# Altium PCB BMS can bang thu dong 4N04R nen nhom.PcbDoc
Units mm, origin at the board's own origin, x right, y up, seen from the top; angles counter-clockwise.
Board outline 114.94 x 60.96 mm, 2 copper layers (Top Layer, Bottom Layer); 103 components, 69 nets, 336 pads, 96 vias.
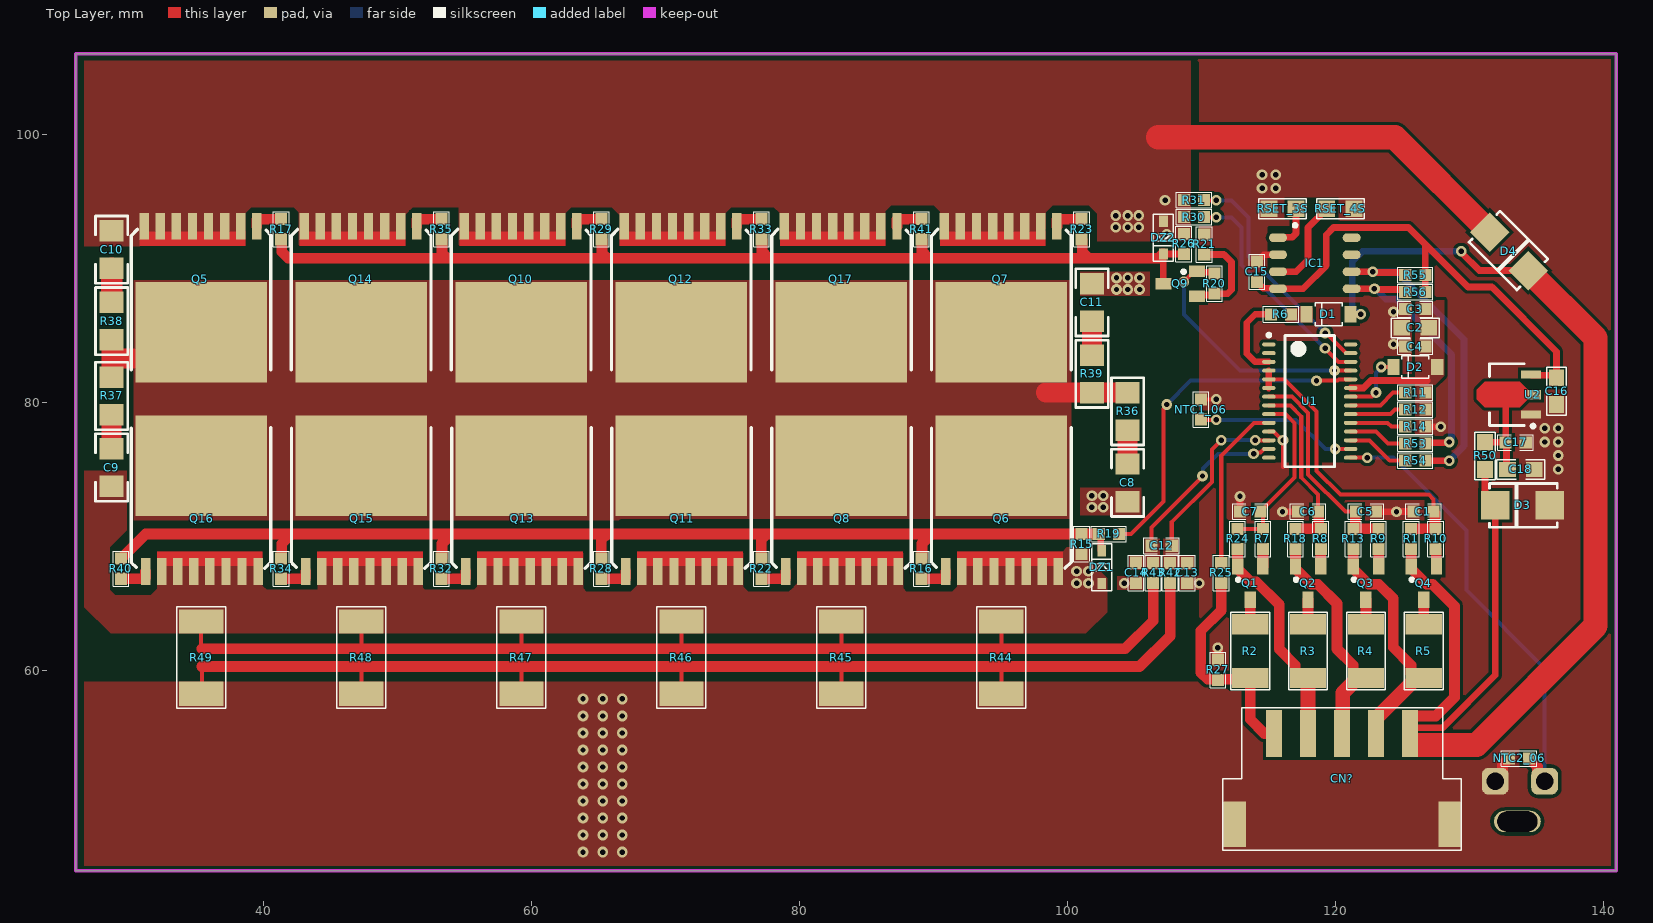
[diagram p0: Top Layer view]
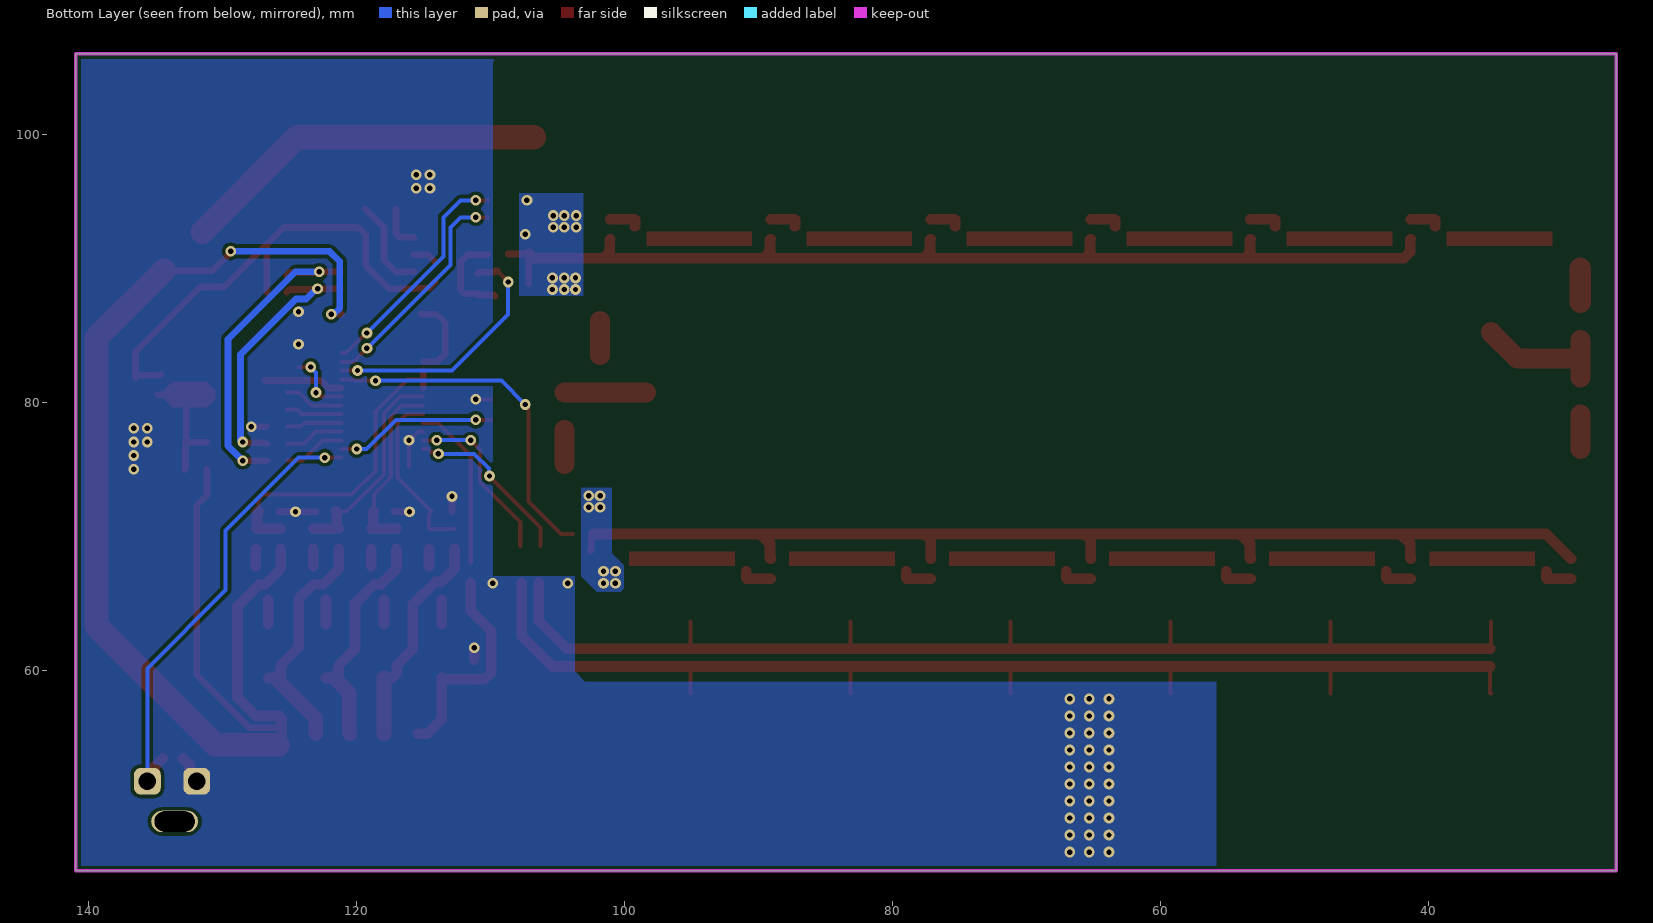
[diagram p1: Bottom Layer view, seen from below]
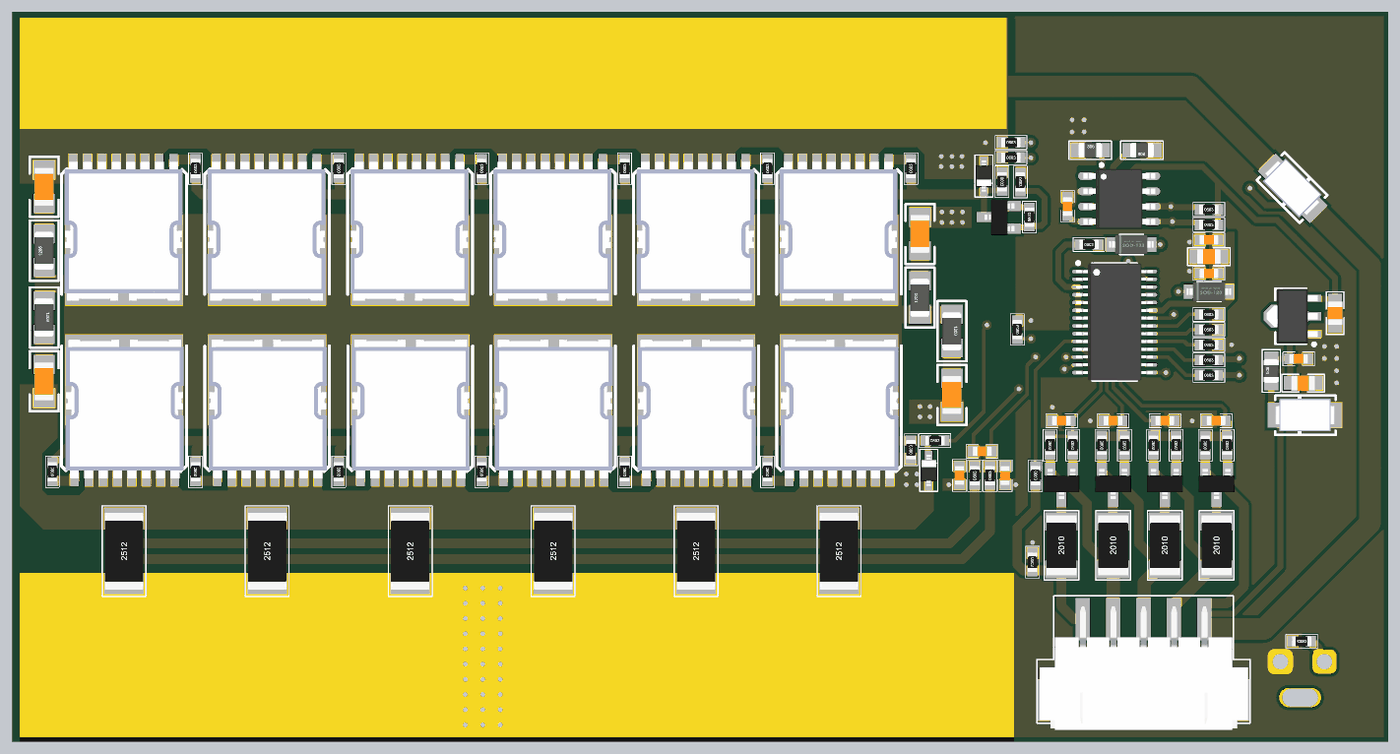
[diagram p2: 3D render of the assembled board from above, using the file's embedded part models]

## Layer stack, top to bottom
Top Solder: solder mask 0.0102, Solder Resist, Dk 3.5
Top Layer: signal copper 0.0356
Dielectric 1: dielectric 0.32, FR-4, Dk 4.8
Bottom Layer: signal copper 0.0356
Bottom Solder: solder mask 0.0102, Solder Resist, Dk 3.5

## Board outline
26.035,45.085 26.035,106.045 140.97,106.045 140.97,45.085

## Design rules (kind name [scope] priority, off if disabled: settings)
Clearance [All] p1: gap=0.15 ignorepadtopadclearanceinfootprint=FALSE except(0.25: Arc-Fill Arc-Poly Arc-Region Track-Fill Track-Poly Track-Region SMDPad-Fill SMDPad-Poly SMDPad-Region THPad-Fill THPad-Poly THPad-Region Via-Fill Via-Poly Via-Region Fill-Fill Fill-Poly Fill-Region Poly-Poly Poly-Region Region-Region)
MinimumSolderMaskSliver [All] p1: minsoldermaskwidth=0
PlaneClearance [All] p1: clearance=0.3
PlaneConnect [All] p1: planeconnectstyle=Direct reliefexpansion=0.508 reliefentries=4 reliefconductorwidth=0.254 reliefairgap=0.254
PolygonConnect [All] p1: connectstyle=Direct reliefconductorwidth=0.254 reliefentries=4 polygonreliefangle="90 Angle" airgapwidth=0.254
RoutingCorners [All] p1: cornerstyle=45-Degree minsetback=0.5 maxsetback=0.5
RoutingVias [All] p1: holewidth=0.4 width=0.8 viastyle="Through Hole" minholewidth=0.3 minwidth=0.45 maxholewidth=0.6 maxwidth=1
SilkToSilkClearance [All] p1: silktosilkclearance=0
SilkToSolderMaskClearance [IsPad] p1: minsilkscreentomaskgap=0 clearancetoexposedcopper=TRUE
SolderMaskExpansion [All] p1: expansion=0.05 istentingtop=FALSE
SupplyNets "Schematic Supply Nets_1" [InNet('B-')] p1: voltage=0.000
Width [All] p1: maxlimit=3 minlimit=0.15 preferedwidth=0.3
24 further rules are at their usual default settings.

## Components (designator, comment, footprint, x,y, rotation, side; value= is the part's Value field where it differs from the comment)
C1 "104_06_50V" "CAP 0603" 126.594,71.894 r0 top value=102/50V
C2 "475_08_16V" "CAP 0805" 125.984,85.598 r0 top
C3 "104_06_16V" "CAP 0603" 125.984,86.995 r180 top
C4 "104_06_16V" "CAP 0603" 125.984,84.201 r0 top
C5 "104_06_50V" "CAP 0603" 122.306,71.894 r180 top value=102/50V
C6 "104_06_50V" "CAP 0603" 117.988,71.894 r0 top value=102/50V
C7 "104_06_50V" "CAP 0603" 113.67,71.894 r0 top value=102/50V
C8 "102_12_50V" "CAPC 1206 (3216)" 104.521,74.041 r90 top
C9 "102_12_50V" "CAPC 1206 (3216)" 28.702,75.181 r90 top
C10 "102_12_50V" "CAPC 1206 (3216)" 28.702,91.44 r270 top
C11 "102_12_50V" "CAPC 1206 (3216)" 101.854,87.503 r270 top
C12 "1uF_06_50V" "CAP 0603" 107.061,69.342 r0 top
C13 "1uF_06_50V" "CAP 0603" 108.966,67.31 r270 top
C14 "1uF_06_50V" "CAP 0603" 105.156,67.322 r90 top
C15 "104_06_16V" "CAP 0603" 114.173,89.789 r270 top
C16 "106_08_16V" "CAP 0805" 136.526,80.875 r90 top
C17 "104_06_50V" "CAP 0603" 133.478,77.059 r180 top
C18 "106_08_50V" "CAP 0805" 133.859,75.033 r180 top
CN? "header" "header 5p 2.54mm" 120.523,51.943 r180 top
D1 "1N4148 (T4)" "SOD-123(4148W-1206 part-part)" 119.507,86.614 r0 top
D2 "1N4148 (T4)" "SOD-123(4148W-1206 part-part)" 125.984,82.677 r0 top
D3 "SMAJ16A - PACKAGE DO214AC" DIODE_DO214AC_SMA(RS1,.M7) 133.986,72.366 r180 top
D4 "RS1M" DIODE_DO214AC_SMA(RS1,.M7) 132.969,91.313 r315 top
DZ1 "13V" SOD-323(4148WS-0805) 102.583,67.74 r90 top
DZ2 "13V" SOD-323(4148WS-0805) 107.188,92.329 r270 top
IC1 "CH32V003J4M6" CH32V003J4M6 118.491,90.424 r0 top
NTC1_06 "10KΩ_06" "RES 0603-1608 1/10W" 109.982,79.502 r90 top
NTC2_06 "10KΩ_06" "RES 0603-1608 1/10W" 133.731,53.467 r180 top
Q1 "2L (2N5401)" SOT23B 113.665,66.56 r180 top value=A1015
Q2 "2L (2N5401)" SOT23B 117.983,66.56 r180 top value=A1015
Q3 "2L (2N5401)" SOT23B 122.301,66.56 r180 top value=A1015
Q4 "2L (2N5401)" SOT23B 126.619,66.56 r180 top value=A1015
Q5 "HYG011N04" "FET khoi dong xe - duplicate" 35.331,89.231 r180 top
Q6 "HYG011N04" "FET khoi dong xe - duplicate" 95.144,71.374 r0 top
Q7 "HYG011N04" "FET khoi dong xe - duplicate" 95.042,89.231 r180 top
Q8 "HYG011N04" "FET khoi dong xe - duplicate" 83.206,71.374 r0 top
Q9 "2L (2N5401)" SOT23B 108.438,88.9 r90 top value=A1015
Q10 "HYG011N04" "FET khoi dong xe - duplicate" 59.216,89.231 r180 top
Q11 "HYG011N04" "FET khoi dong xe - duplicate" 71.268,71.374 r0 top
Q12 "HYG011N04" "FET khoi dong xe - duplicate" 71.158,89.231 r180 top
Q13 "HYG011N04" "FET khoi dong xe - duplicate" 59.33,71.374 r0 top
Q14 "HYG011N04" "FET khoi dong xe - duplicate" 47.274,89.231 r180 top
Q15 "HYG011N04" "FET khoi dong xe - duplicate" 47.38,71.374 r0 top
Q16 "HYG011N04" "FET khoi dong xe - duplicate" 35.433,71.374 r0 top
Q17 "HYG011N04" "FET khoi dong xe - duplicate" 83.104,89.231 r180 top
R1 "1KΩ_06" "RES 0603-1608 1/10W" 125.679,69.85 r270 top
R2 "51Ω_12" "RES 2010-5025 3/4W" 113.665,61.48 r90 top
R3 "51Ω_12" "RES 2010-5025 3/4W" 117.983,61.48 r90 top
R4 "51Ω_12" "RES 2010-5025 3/4W" 122.301,61.48 r90 top
R5 "51Ω_12" "RES 2010-5025 3/4W" 126.619,61.48 r90 top
R6 "10Ω_06" "RES 0603-1608 1/10W" 115.963,86.614 r0 top
R7 "510Ω_06" "RES 0603-1608 1/10W" 114.615,69.85 r90 top
R8 "510Ω_06" "RES 0603-1608 1/10W" 118.933,69.85 r90 top
R9 "510Ω_06" "RES 0603-1608 1/10W" 123.251,69.85 r90 top
R10 "510Ω_06" "RES 0603-1608 1/10W" 127.508,69.85 r90 top
R11 "10KΩ_06" "RES 0603-1608 1/10W" 125.984,80.772 r0 top
R12 "10KΩ_06" "RES 0603-1608 1/10W" 125.984,79.502 r0 top
R13 "1KΩ_06" "RES 0603-1608 1/10W" 121.361,69.85 r270 top
R14 "10MΩ_06" "RES 0603-1608 1/10W" 125.984,78.232 r0 top
R15 "10KΩ_06" "RES 0603-1608 1/10W" 101.092,69.469 r90 top
R16 "68Ω" "RES 0603-1608 1/10W" 89.124,67.627 r270 top
R17 "68Ω" "RES 0603-1608 1/10W" 41.353,92.964 r90 top
R18 "1KΩ_06" "RES 0603-1608 1/10W" 117.043,69.85 r270 top
R19 "1KΩ_06" "RES 0603-1608 1/10W" 103.112,70.231 r0 top
R20 "1MΩ_06" "RES 0603-1608 1/10W" 110.998,88.9 r90 top
R21 "100KΩ_06" "RES 0603-1608 1/10W" 110.236,91.833 r270 top
R22 "68Ω" "RES 0603-1608 1/10W" 77.186,67.627 r270 top
R23 "68Ω" "RES 0603-1608 1/10W" 101.092,92.964 r90 top
R24 "1KΩ_06" "RES 0603-1608 1/10W" 112.725,69.85 r270 top
R25 "1KΩ_06" "RES 0603-1608 1/10W" 111.506,67.31 r270 top
R26 "10KΩ_06" "RES 0603-1608 1/10W" 108.712,91.864 r270 top
R27 "1KΩ_06" "RES 0603-1608 1/10W" 111.252,60.083 r270 top
R28 "68Ω" "RES 0603-1608 1/10W" 65.248,67.627 r270 top
R29 "68Ω" "RES 0603-1608 1/10W" 65.248,92.964 r90 top
R30 "10KΩ_06" "RES 0603-1608 1/10W" 109.462,93.872 r0 top
R31 "10KΩ_06" "RES 0603-1608 1/10W" 109.462,95.142 r0 top
R32 "68Ω" "RES 0603-1608 1/10W" 53.31,67.627 r270 top
R33 "68Ω" "RES 0603-1608 1/10W" 77.186,92.964 r90 top
R34 "68Ω" "RES 0603-1608 1/10W" 41.353,67.627 r270 top
R35 "68Ω" "RES 0603-1608 1/10W" 53.31,92.964 r90 top
R36 "10Ω_12" "RES 1206- 3216 1/4W" 104.521,79.369 r270 top
R37 "10Ω_12" "RES 1206- 3216 1/4W" 28.702,80.518 r270 top
R38 "10Ω_12" "RES 1206- 3216 1/4W" 28.702,86.106 r90 top
R39 "10Ω_12" "RES 1206- 3216 1/4W" 101.854,82.169 r90 top
R40 "68Ω" "RES 0603-1608 1/10W" 29.396,67.627 r270 top
R41 "68Ω" "RES 0603-1608 1/10W" 89.124,92.964 r90 top
R42 "22Ω_06" "RES 0603-1608 1/10W" 107.696,67.31 r90 top
R43 "22Ω_06" "RES 0603-1608 1/10W" 106.426,67.31 r90 top
R44 "1.5mΩ" "RES 2512-6332 1W" 95.118,61 r0 top
R45 "1.5mΩ" "RES 2512-6332 1W" 83.18,61 r0 top
R46 "1.5mΩ" "RES 2512-6332 1W" 71.242,61 r0 top
R47 "1.5mΩ" "RES 2512-6332 1W" 59.305,61 r0 top
R48 "1.5mΩ" "RES 2512-6332 1W" 47.355,61 r0 top
R49 "1.5mΩ" "RES 2512-6332 1W" 35.408,61 r0 top
R50 "1Ω_08" "RES 0805-2012 1/8W" 131.192,76.049 r90 top
R53 "120Ω_06" "RES 0603-1608 1/10W" 125.984,76.962 r0 top
R54 "120Ω_06" "RES 0603-1608 1/10W" 125.984,75.692 r0 top
R55 "10KΩ_06" "RES 0603-1608 1/10W" 125.984,89.535 r0 top
R56 "10KΩ_06" "RES 0603-1608 1/10W" 125.984,88.265 r0 top
RSET_3S "0Ω_08" "RES 0805-2012 1/8W" 116.078,94.488 r0 top
RSET_4S "0Ω_08" "RES 0805-2012 1/8W" 120.396,94.488 r180 top
U1 "MOLI3206" TSSOP28-WIDE-BODY 118.11,80.137 r0 top
U2 "HT7550-1" SOT89 132.97,80.621 r180 top

## Footprints (in the part's own frame and the unit in brackets; to place one, negate y for a bottom-side part, rotate by r counter-clockwise, add the part's x,y. Pads: shape width x height; smd on the part's side, far side on the other; paste and mask are expansions set on the pad)
"CAP 0603" [mm]
  rect 0.9x0.9 smd: 1(-0.75,0) 2(0.75,0)
  silkscreen extent -1.32,-0.58 1.32,0.58, body extent -0.8,-0.4 0.8,0.4, height 0.6
"CAP 0805" [mm]
  rect 1.25x1.15 smd: 1(-1,0) 2(1,0)
  silkscreen extent -1.78,-0.74 1.78,0.74, body extent -1,-0.62 1,0.63, height 0.7
"CAPC 1206 (3216)" [mm] "Resistor, Chip; 3.10 mm L X 1.60 mm W X 0.90 mm H body"
  rect 1.6x1.8 smd: 1(-1.4,0) 2(1.4,0)
  silkscreen extent -2.51,-1.21 2.51,1.21, body extent -1.6,-0.8 1.6,0.8, height 0.75
CH32V003J4M6 [mm] "TSOP, 8-Leads, Body 5.00x3.90mm, Pitch 1.27mm, IPC Medium Density"
  oval 1.35x0.65 smd: 1(-2.75,1.905) 2(-2.75,0.635) 3(-2.75,-0.635) 4(-2.75,-1.905) 5(2.75,-1.905) 6(2.75,-0.635) 7(2.75,0.635) 8(2.75,1.905)
  silkscreen extent -1.6,2.7 -1.35,2.95, body extent -3,-2.5 3,2.5, height 1.55
DIODE_DO214AC_SMA(RS1,.M7) [mm] "Diode 2214AC- SMA type"
  rect 2.1x2.1 smd: 1(-2.032,0) 2(2.032,0)
  silkscreen extent -2.59,-1.63 2.46,1.7, body extent -2.53,-1.35 2.47,1.35, height 2.25
"FET khoi dong xe - duplicate" [mm]
  rect 0.7x2 smd: 1(-4.2,-3.947) 3(-3,-3.947) 3(-1.8,-3.947) 3(-0.6,-3.947) 3(0.6,-3.947) 3(1.8,-3.947) 3(3,-3.947) 3(4.2,-3.947)
  rect 9.8x7.5 smd: 2(-0.051,3.947)
  Top Layer region: -3.327,-3.54 -3.327,-2.486 4.521,-2.486 4.521,-3.54
  silkscreen extent -5.26,-3.72 5.16,6.77, body extent -4.93,-4.29 4.92,7.31, height 2.3
"header 5p 2.54mm" [mm]
  rect 1.2x3.5 smd paste+0: 1(-5.08,-3.375) 2(-2.54,-3.375) 3(0,-3.375) 4(2.54,-3.375) 5(5.08,-3.375)
  rect 1.7x3.4 smd paste+0: 6(-8.03,3.375) 6(8.03,3.375)
  silkscreen extent -8.9,-5.33 8.9,5.33, body extent -8.72,-4.44 8.68,5.86, height 6.5
"RES 0603-1608 1/10W" [mm] "Chip Resistor, 2-Leads, Body 1.60x0.80mm, IPC High Density"
  rect 0.9x0.9 smd: 1(-0.75,0) 2(0.75,0)
  silkscreen extent -1.32,-0.58 1.32,0.58, body extent -0.8,-0.4 0.8,0.4, height 0.43
"RES 0805-2012 1/8W" [mm] "Chip Resistor, 2-Leads, Body 2.00x1.30mm, IPC Medium Density"
  rect 1.25x1.2 smd: 1(-1.01,0) 2(1.01,0)
  silkscreen extent -1.78,-0.76 1.78,0.76, body extent -1,-0.62 1,0.63, height 0.8
"RES 1206- 3216 1/4W" [mm]
  rect 1.6x1.8 smd: 1(-1.4,0) 2(1.4,0)
  silkscreen extent -2.51,-1.21 2.51,1.21, body extent -1.6,-0.8 1.6,0.8, height 1.02
"RES 2010-5025 3/4W" [mm]
  rect 1.5x2.7 smd: 1(-2,0) 2(2,0)
  silkscreen extent -2.9,-1.45 2.9,1.45, body extent -2.5,-1.25 2.5,1.25, height 0.6
"RES 2512-6332 1W" [mm]
  rect 3.3x1.8 smd: 1(-0.025,-2.7) 2(-0.025,2.7)
  silkscreen extent -1.85,-3.78 1.8,3.78, body extent -1.63,-3.2 1.57,3.2, height 0.6
"SOD-123(4148W-1206 part-part)" [mm]
  rect 0.91x1.22 smd: 1(1.634,0) 2(-1.636,0)
  silkscreen extent -0.99,-0.85 1.02,0.85, body extent -1.85,-0.8 1.85,0.8, height 1.25
SOD-323(4148WS-0805) [mm] "Molded Diode, 2-Leads, Body 1.70x1.30mm, IPC Medium Density"
  rect 0.85x0.65 smd: 1(-1.215,0) 2(1.215,0)
  silkscreen extent -1.75,-0.75 1.75,0.75, body extent -1.3,-0.68 1.3,0.67, height 1.1
SOT23B [mm] "SOT 23B"
  rect 0.85x1.2 smd: 1(0.94,-1.245) 2(0,1.25) 3(-0.95,-1.25)
  silkscreen extent 0.77,-0.38 1.02,-0.13, body extent -1.5,-1.3 1.5,1.2, height 1.06
SOT89 [mm] "SOT89, 3-Leads, Body 4.50x2.45mm, Pitch 1.50mm, Lead Span 3.5mm, IPC Low Density"
  rect 1.5x0.6 smd: 1(-1.65,1.5) 3(-1.65,-1.5)
  rect 1x0.7 smd: 2(-1.9,0)
  Top Layer region: -1.4,0.35 -0.8,0.95 1.8,0.95 2.4,0.35 2.4,-0.35 1.8,-0.95 -0.8,-0.95 -1.4,-0.35
  silkscreen extent -1.92,-2.3 1.45,2.47, body extent -2.1,-2.3 2.15,2.3, height 1.6
TSSOP28-WIDE-BODY [mm] "TSOP, 28-Leads, Body 9.70x4.40mm, Pitch 0.65mm, IPC Low Density"
  oval 1x0.3 smd: 1(-3.05,4.225) 2(-3.05,3.575) 3(-3.05,2.925) 4(-3.05,2.275) 5(-3.05,1.625) 6(-3.05,0.975) 7(-3.05,0.325) 8(-3.05,-0.325) 9(-3.05,-0.975) 10(-3.05,-1.625) 11(-3.05,-2.275) 12(-3.05,-2.925) 13(-3.05,-3.575) 14(-3.05,-4.225) 15(3.05,-4.225) 16(3.05,-3.575) 17(3.05,-2.925) 18(3.05,-2.275) 19(3.05,-1.625) 20(3.05,-0.975) 21(3.05,-0.325) 22(3.05,0.325) 23(3.05,0.975) 24(3.05,1.625) 25(3.05,2.275) 26(3.05,2.925) 27(3.05,3.575) 28(3.05,4.225)
  silkscreen extent -3.17,-4.9 1.85,5.05, body extent -3.2,-4.9 3.2,4.9, height 1.2

## Part data
C1 C5 C6 C7: library part C0603C102K5RACTU, "CAP CER 1nF 50V 10% X7R 0603", Category=CAPACITOR, CompanyID=VT-00573, MPN=C0603C102K5RACTU, PinCount=2, Solder=SMT
C2 C3 C4 C8 C9 C10 C11 C12 C13 C14 C15 C16 C17 C18: library part CAP-SMD
D1 D3 D4: library part DIODE
D2: library part DIODE, "1N4148 (T4 SOD123)"
DZ1 DZ2: library part ZENNER, "DIODE ZENNER BZT52C5V6 SOD123"
IC1: "CH32V003J4M6 - RISC-V MCU, 48MHz, 16KB Flash, 2KB SRAM   / + Package: SOP-8   / + Voltage: 3.3V - 5V / + I/O: 6 Pins   / + Timers: 1 Advanced, 1 General, 2 Watchdog   / + Communication: ADC, I2C, USART"
NTC1_06 NTC2_06 R1 R2 R3 R4 R5 R6 R7 R8 R9 R10 R11 R12 R13 R14 R15 R16 R17 R18 R19 R20 R21 R22 R23 R24 R25 R26 R27 R28 R29 R30 R31 R32 R33 R34 R35 R36 R37 R38 R39 R40 R41 R42 R43 R44 R45 R46 R47 R48 R49 R50 R53 R54 R55 R56 RSET_3S RSET_4S: library part "RES SMD"
Q1 Q2 Q3 Q4 Q9: library part A1015, "PNP 600mW, ECB"
Q5 Q6 Q7 Q8 Q10 Q11 Q12 Q13 Q14 Q15 Q16 Q17: library part "FET to khoi dong xe"
U1: "BMS 3S to 6S"
U2: library part 75xx-1, "LDO 100mA, Vin_max = 24V."

## Free pads (board coordinates)
  rrect50% 2x2 hole 1.3: 1(131.953,51.768) 1(135.636,51.768)
  oval 3.5x1.6 hole 1.524 slot 3 at 0 deg unplated: 1(133.604,48.768)

## Via types
v1: diameter 0.8, hole 0.4, Top Layer to Bottom Layer, tented both sides, 96 vias

## Nets (pads, with @x,y where several pads share a name; then routed paths per layer and width w, separated by ;. In a path a pad name is that pad's centre, name@x,y a point inside that pad or via, vN(x,y) a via of type N, cw(c..) or ccw(c..) an arc to the next point about the centre after c; other vN are vias at no path point)
ALERT: R14.1 U1.19 | length 4.2
  Top Layer w0.3: U1.19 123.926,78.512 124.206,78.232 R14.1
B0: CN?.5 R2.1 R25.2 R27.2 | length 16.6
  Top Layer w0.8: R25.2 111.506,64.516 109.982,62.992 109.982,59.889 110.488,59.383 111.202,59.383 R27.2 111.302,59.383 113.568,59.383 R2.1 113.665,56.388 114.735,55.318 CN?.5
B1: CN?.4 Q1.1 R3.1 R24.2 | length 16.6
  Top Layer w0.8: R24.2 Q1.1 112.725,67.63 113.695,66.66 114.118,66.66 115.824,64.954 115.824,61.639 117.033,60.43 117.033,59.83 117.383,59.48 R3.1
  Top Layer w1.1: CN?.4 R3.1
B2: CN?.3 Q2.1 R4.1 R18.2 | length 17.1
  Top Layer w0.8: R18.2 Q2.1 117.043,67.63 118.213,66.46 118.706,66.46 120.142,65.024 120.142,61.639 121.351,60.43 121.351,59.83 121.701,59.48 R4.1
  Top Layer w1.1: CN?.3 120.573,55.368 120.573,58.352 R4.1@121.701,59.48
B3: CN?.2 Q3.1 R5.1 R13.2 | length 18
  Top Layer w0.8: R13.2 121.361,67.63 122.518,66.473 123.265,66.473 124.333,65.405 124.333,61.766 125.669,60.43 125.669,59.83 126.019,59.48 R5.1
  Top Layer w1.1: CN?.2 123.063,56.468 125.819,59.224 125.819,59.28 R5.1@126.019,59.48
B4: CN?.1 D1.1 D3.2 D4.2 Q4.1 R1.2 R50.1 | length 106
  Top Layer w0.5: D1.1 v1(121.92,86.614) ; CN?.1@125.953,55.753 128.016,55.753 131.954,59.691 D3.2 131.192,73.128 R50.1 ; v1(129.413,91.313) 129.413,91.232 130.769,89.876 D4.2
  Top Layer w0.8: CN?.1 125.603,56.442 125.803,56.642 127.508,56.642 128.905,58.039 128.905,64.827 127.272,66.46 126.849,66.46 125.679,67.63 Q4.1 R1.2
  Top Layer w1.8: CN?.1@125.903,54.483 130.556,54.483 139.446,63.373 139.446,84.836 D4.2
  Bottom Layer w0.5: v1(121.92,86.614) 121.839,86.614 121.689,86.764 121.578,86.764 121.285,87.057 121.285,90.551 122.047,91.313 v1(129.413,91.313)
B-: C1.1 C2.1 C3.2 C4.1 C5.1 C6.1 C7.1 C13.2 C14.1 C15.1 C16.1 C17.1 C18.1 CN?.6 D3.1 IC1.2 NTC1_06.2 NTC2_06.2 pad.1@131.953,51.768 R14.2 R21.1 R27.1 R42.1 R44.1 R45.1 R46.1 R47.1 R48.1 R49.1 RSET_3S.1 RSET_4S.1 U1.11 U2.1 | length 104.9
  Top Layer w0.3: R49.1 35.433,58.351 35.433,60.325 ; R48.1 47.329,60.283 47.371,60.325 ; R47.1 59.279,60.295 59.309,60.325 ; R46.1 71.217,60.295 71.247,60.325 ; R45.1 83.155,60.295 83.185,60.325 ; R44.1 95.093,60.295 95.123,60.325 ; NTC1_06.2 109.994,80.264 v1(111.125,80.264) ; U1.11 115.41,77.862 116.055,77.217 v1(116.11,77.217) 116.11,75.216
  Top Layer w0.5: v1(112.903,73.025) 112.912,73.016 112.912,71.903 C7.1 ; C15.1 114.693,91.059 IC1.2 ; v1(116.078,71.882) 116.084,71.888 117.232,71.888 C6.1 ; C5.1 123.062,71.888 124.581,71.888 v1(124.587,71.882) 124.599,71.894 C1.1 ; R14.2 v1(127.889,78.232)
  Top Layer w0.8: 35.433,60.325 47.371,60.325 59.309,60.325 71.247,60.325 83.185,60.325 95.123,60.325 105.41,60.325 107.696,62.611 R42.1 ; R27.1 v1(111.252,61.722) ; pad.1@131.953,51.768 132.491,52.306 132.491,52.977 NTC2_06.2
  other v1: 63.881,46.482 65.341,46.482 66.802,46.482 63.881,47.752 65.341,47.752 66.802,47.752 63.881,49.022 65.341,49.022 66.802,49.022 63.881,50.292 65.341,50.292 66.802,50.292 63.881,51.562 65.341,51.562 66.802,51.562 63.881,52.832 65.341,52.832 66.802,52.832 63.881,54.102 65.341,54.102 66.802,54.102 63.881,55.372 65.341,55.372 66.802,55.372 63.881,56.642 65.341,56.642 66.802,56.642 63.881,57.912 65.341,57.912 66.802,57.912 104.267,66.548 109.855,66.548 136.652,75.057 136.652,76.073 135.636,77.089 136.652,77.089 135.636,78.105 136.652,78.105 124.359,84.387 124.359,86.809 114.554,96.012 115.57,96.012 114.554,97.028 115.57,97.028
BAT: R6.1 U1.3 | length 6.3
  Top Layer w0.5: U1.3 114.042,83.062 113.411,83.693 113.411,85.979 114.046,86.614 R6.1
BCELL1: U1.2
BCELL2: U1.1
BCELL3: U1.28
BS: C8.1 C9.1 DZ1.1 Q6.3 Q8.3 Q11.3 Q13.3 Q15.3 Q16.3 R15.1 R43.1 R44.2 R45.2 R46.2 R47.2 R48.2 R49.2 | length 87.1
  Top Layer w0.3: R49.2 35.382,61.697 35.433,61.646 ; 47.244,61.646 47.329,61.731 R48.2 ; R47.2 59.279,61.676 59.309,61.646 ; R46.2 71.217,61.676 71.247,61.646 ; R45.2 83.155,61.676 83.185,61.646 ; R44.2 95.093,61.676 95.123,61.646
  Top Layer w0.8: 35.433,61.646 47.244,61.646 83.185,61.646 95.123,61.646 104.318,61.646 106.426,63.754 R43.1
  other v1: 100.711,66.548 101.6,66.548 100.711,67.437 101.6,67.437 101.854,72.215 102.691,72.215 101.854,73.076 102.691,73.076
CHG: Q9.1 R20.2 U1.25 | length 19.3
  Top Layer w0.3: v1@108.712,89.044 Q9.1@109.508,89.84 ; v1(119.96,82.423) 120.799,82.423 120.81,82.412 U1.25
  Top Layer w0.5: v1(108.712,89.027) v1@108.712,89.044 ; Q9.1@109.508,89.84 Q9.1 109.778,89.745 110.903,89.745 R20.2
  Bottom Layer w0.3: v1(108.712,89.027) 108.712,86.614 112.903,82.423 v1(119.96,82.423)
CHGD: R30.2 U1.26 | length 17.1
  Top Layer w0.3: R30.2 110.231,93.853 v1(111.125,93.853) ; v1(119.253,84.074) 120.265,83.062 U1.26
  Bottom Layer w0.3: v1(111.125,93.853) 112.268,93.853 113.03,93.091 113.03,90.297 v1(119.253,84.074)
CTLC: R11.1 U1.21 | length 4.5
  Top Layer w0.3: U1.21 123.373,79.812 124.333,80.772 R11.1
CTLD: R12.1 U1.20 | length 4.2
  Top Layer w0.3: U1.20 124.12,79.162 124.46,79.502 R12.1
D: Q5.2 Q6.2 Q7.2 Q8.2 Q10.2 Q11.2 Q12.2 Q13.2 Q14.2 Q15.2 Q16.2 Q17.2 R36.1 R37.1 R38.1 R39.1 | length 16.4
  Top Layer w1.5: R37.1 28.702,83.312 ; R38.1 28.702,83.312 ; Q5.2 33.41,83.312 28.702,83.312 ; 98.425,80.772 98.428,80.769 R39.1 R36.1
DSG: R19.2 U1.24 | length 26.2
  Top Layer w0.3: R19.2 104.775,70.231 107.188,72.644 107.188,79.548 107.442,79.802 v1(107.442,79.883) ; v1(118.618,81.661) 120.188,81.661 120.289,81.762 U1.24
  Bottom Layer w0.3: v1(107.442,79.883) 109.22,81.661 v1(118.618,81.661)
DSGD: R31.2 U1.27 | length 17.4
  Top Layer w0.3: R31.2 110.231,95.123 v1(111.125,95.123) ; v1(119.253,85.217) 119.305,85.217 120.81,83.712 U1.27
  Bottom Layer w0.3: v1(111.125,95.123) 112.268,95.123 113.538,93.853 113.538,90.932 v1(119.253,85.217)
G-CO: DZ2.2 Q9.2 R17.1 R23.1 R26.2 R29.1 R33.1 R35.1 R41.1 | length 78.8
  Top Layer w0.5: Q9.2 DZ2.2 R26.2
  Top Layer w0.8: R17.1 41.403,92.164 41.403,91.274 41.872,90.805 53.721,90.805 ; R35.1 53.36,92.164 53.36,91.166 53.721,90.805 ; R29.1 65.298,92.164 65.298,91.166 65.659,90.805 ; R33.1 77.236,92.164 77.236,91.293 77.724,90.805 ; R41.1 89.174,92.164 89.174,91.293 89.662,90.805 ; R23.1 101.142,92.164 101.142,91.263 101.6,90.805 ; DZ2.2 107.138,91.114 106.829,90.805 101.6,90.805 ; 53.721,90.805 65.659,90.805 ; 65.659,90.805 77.724,90.805 ; 77.724,90.805 89.662,90.805 ; 89.662,90.805 101.6,90.805
G-DO: DZ1.2 R15.2 R16.1 R19.1 R22.1 R28.1 R32.1 R34.1 R40.1 | length 85.6
  Top Layer w0.5: R19.1 102.508,70.085 102.508,69.03 DZ1.2
  Top Layer w0.8: R40.1 31.238,70.219 42.122,70.219 ; R34.1 41.403,68.427 41.403,69.5 42.122,70.219 ; R32.1 53.36,68.427 53.36,69.507 54.072,70.219 ; R28.1 65.248,69.808 65.659,70.219 ; R22.1 77.186,69.808 77.597,70.219 ; R16.1 89.174,68.427 89.174,69.507 89.886,70.219 ; R19.1 102.356,70.225 101.098,70.225 R15.2 89.886,70.219 ; 42.122,70.219 54.072,70.219 ; 54.072,70.219 65.659,70.219 ; 65.659,70.219 77.597,70.219 ; 77.597,70.219 89.886,70.219
MCU_SCL: IC1.6 R54.2 R55.1 | length 24.3
  Top Layer w0.5: IC1.6 v1(122.809,89.789) 122.866,89.732 125.037,89.732 R55.1 ; R54.2 v1(128.524,75.692)
  Bottom Layer w0.5: v1(122.809,89.789) 124.587,89.789 129.626,84.75 129.626,76.794 v1(128.524,75.692)
MCU_SDA: IC1.5 R53.2 R56.1 | length 20.3
  Top Layer w0.5: IC1.5 v1(122.936,88.519) 122.993,88.462 125.037,88.462 R56.1 ; R53.2 126.804,77.032 128.467,77.032 v1(128.524,77.089)
  Bottom Layer w0.5: v1(122.936,88.519) 123.017,88.519 123.782,87.754 124.545,87.754 128.689,83.61 128.689,77.254 v1(128.524,77.089)
NetC8_2: C8.2 R36.2 | length 2.5
  Top Layer w1.5: C8.2 R36.2
NetC9_2: C9.2 R37.2 | length 2.5
  Top Layer w1.5: C9.2 R37.2
NetC10_2: C10.2 R38.2 | length 2.5
  Top Layer w1.6: R38.2 C10.2
NetC11_2: C11.2 R39.2 | length 2.5
  Top Layer w1.5: R39.2 C11.2
NetC17_2: C17.2 C18.2 R50.2 U2.2 | length 9.3
  Top Layer w0.5: R50.2 C17.2 ; C18.2 132.794,75.099 132.794,76.994 C17.2 ; U2.2 132.82,80.621 132.728,80.529 C17.2
NetD1_2: D1.2 R6.2
NetQ1_2: Q1.2 R2.2 | length 1.8
  Top Layer w0.8: R2.2 Q1.2
NetQ1_3: Q1.3 R7.1 | length 1.3
  Top Layer w0.8: Q1.3 R7.1
NetQ2_2: Q2.2 R3.2 | length 1.8
  Top Layer w0.8: R3.2 Q2.2
NetQ2_3: Q2.3 R8.1 | length 1.3
  Top Layer w0.8: Q2.3 R8.1
NetQ3_2: Q3.2 R4.2 | length 1.8
  Top Layer w0.8: R4.2 Q3.2
NetQ3_3: Q3.3 R9.1 | length 1.3
  Top Layer w0.8: Q3.3 R9.1
NetQ4_2: Q4.2 R5.2 | length 1.8
  Top Layer w0.8: R5.2 Q4.2
NetQ4_3: Q4.3 R10.1 | length 1.3
  Top Layer w0.8: R10.1 127.544,69.064 127.544,67.835 Q4.3
NetQ5_1: Q5.1 R17.2 | length 2.3
  Top Layer w0.8: Q5.1 39.531,93.664 39.581,93.714 R17.2
NetQ6_1: Q6.1 R16.2 | length 2.3
  Top Layer w0.8: R16.2 90.894,66.877 90.944,66.927 Q6.1
NetQ7_1: Q7.1 R23.2 | length 2.4
  Top Layer w0.8: Q7.1 99.242,93.664 99.292,93.714 R23.2
NetQ8_1: Q8.1 R22.2 | length 2.3
  Top Layer w0.8: R22.2 78.956,66.877 79.006,66.927 Q8.1
NetQ9_3: Q9.3 R20.1 R21.2 | length 7
  Top Layer w0.5: Q9.3 109.788,88.05 R20.1@110.898,88.05 ; R21.2 111.697,91.083 112.268,90.512 112.268,88.443 111.975,88.15 R20.1
NetQ10_1: Q10.1 R29.2 | length 2.3
  Top Layer w0.8: Q10.1 63.416,93.664 63.466,93.714 R29.2
NetQ11_1: Q11.1 R28.2 | length 2.3
  Top Layer w0.8: R28.2 67.018,66.877 67.068,66.927 Q11.1
NetQ12_1: Q12.1 R33.2 | length 2.3
  Top Layer w0.8: Q12.1 75.358,93.664 75.408,93.714 R33.2
NetQ13_1: Q13.1 R32.2 | length 2.3
  Top Layer w0.8: R32.2 55.08,66.877 55.13,66.927 Q13.1
NetQ14_1: Q14.1 R35.2 | length 2.3
  Top Layer w0.8: Q14.1 51.474,93.664 51.524,93.714 R35.2
NetQ15_1: Q15.1 R34.2 | length 2.3
  Top Layer w0.8: R34.2 43.13,66.877 43.18,66.927 Q15.1
NetQ16_1: Q16.1 R40.2 | length 2.4
  Top Layer w0.8: R40.2 31.183,66.877 31.233,66.927 Q16.1
NetQ17_1: Q17.1 R41.2 | length 2.3
  Top Layer w0.8: Q17.1 87.304,93.664 87.354,93.714 R41.2
P-: C10.1 C11.1 D4.1 DZ2.1 Q5.3 Q7.3 Q10.3 Q12.3 Q14.3 Q17.3 R26.1 R30.1 R31.1 | length 27.7
  Top Layer w1.8: 106.807,99.822 124.46,99.822 D4.1
  other v1: 103.684,88.468 104.521,88.468 105.41,88.468 103.684,89.329 104.521,89.329 105.41,89.329 107.442,92.583 103.632,93.118 104.521,93.118 105.358,93.118 103.632,93.979 104.521,93.979 105.358,93.979 107.315,95.123
P_GET_3S: IC1.1 RSET_3S.2 | length 3.3
  Top Layer w0.5: IC1.1 115.77,92.358 116.795,92.358 117.088,92.651 RSET_3S.2
P_GET_4S: IC1.3 RSET_4S.2 | length 7
  Top Layer w0.5: IC1.3 117.094,89.789 117.983,90.678 117.983,93.085 RSET_4S.2
RSN1: C12.1 C14.2 R43.2 U1.13 | length 12.9
  Top Layer w0.3: C12.1 106.311,70.701 110.109,74.499 v1(110.109,74.549) ; v1(113.919,76.2) 114.015,76.296 114.444,76.296 114.71,76.562 U1.13
  Bottom Layer w0.3: v1(110.109,74.549) 110.156,74.596 110.156,75.104 111.252,76.2 v1(113.919,76.2)
RSN2: U1.14
RSP: C12.2 C13.1 R42.2 U1.12 | length 13
  Top Layer w0.3: C12.2 107.811,71.108 110.809,74.106 110.809,76.519 v1(111.506,77.216) ; v1(114.046,77.212) U1.12
  Bottom Layer w0.3: v1(111.506,77.216) v1@114.042,77.216
SCL_MOLI: R54.1 U1.17 | length 4.7
  Top Layer w0.3: U1.17 122.559,77.212 124.079,75.692 R54.1
SDA_MOLI: R53.1 U1.18 | length 4.4
  Top Layer w0.3: U1.18 123.052,77.862 123.952,76.962 R53.1
SWIO: IC1.8
TS1: NTC1_06.1 U1.16 | length 12.1
  Top Layer w0.3: NTC1_06.1 109.994,78.74 v1(111.125,78.74) ; v1@120.015,76.454 120.15,76.454 120.258,76.562 U1.16
  Bottom Layer w0.3: v1(111.125,78.74) 117.094,78.74 119.272,76.562 v1(120.015,76.562)
TS2: NTC2_06.1 pad.1@135.636,51.768 U1.15 | length 34.2
  Top Layer w0.3: U1.15 v1(122.394,75.912)
  Top Layer w0.8: NTC2_06.1 135.098,52.85 135.098,52.306 pad.1@135.636,51.768
  Bottom Layer w0.3: v1(122.394,75.912) 124.367,75.912 129.794,70.485 129.794,66.04 135.636,60.198 pad.1@135.636,51.768
VC0: R25.1 U1.10 | length 12.6
  Top Layer w0.3: R25.1 111.506,76.073 113.945,78.512 U1.10
VC1: C7.2 R7.2 R24.1 U1.9 | length 13.1
  Top Layer w0.3: R24.1 R7.2 114.615,71.699 C7.2 116.967,74.441 116.967,78.486 116.291,79.162 U1.9
VC2: C6.2 R8.2 R18.1 U1.8 | length 13.6
  Top Layer w0.3: U1.8 116.657,79.812 117.475,78.994 117.475,74.422 118.738,73.159 C6.2
  Top Layer w0.8: R18.1 R8.2 118.788,70.745 118.788,71.844 C6.2
VC3: C5.2 R9.2 R13.1 U1.7 | length 16
  Top Layer w0.3: U1.7 116.769,80.462 117.983,79.248 117.983,74.675 120.764,71.894 C5.2
  Top Layer w0.8: C5.2 121.506,71.844 121.506,70.745 R13.1 R9.2
VC4: C1.2 R1.1 R10.2 U1.4 U1.5 U1.6 | length 24
  Top Layer w0.3: U1.5 116.231,81.762 118.618,79.375 118.618,74.93 120.396,73.152 127,73.152 127.344,72.808 C1.2
  Top Layer w0.5: U1.6 U1.5 U1.4
  Top Layer w0.8: R1.1 R10.2 127.458,70.65 127.458,71.78 C1.2
VCC: C2.2 C3.1 C4.2 D2.1 R11.2 R12.2 U1.23 | length 5.9
  Top Layer w0.5: U1.23 122.133,81.112 122.688,81.667 126.867,81.667
VDD: C15.2 C16.2 IC1.4 R55.2 R56.2 U2.3 | length 37.1
  Top Layer w0.5: C15.2 114.664,88.548 115.712,88.548 IC1.4 117.602,88.519 119.35,90.267 119.35,92.553 119.888,93.091 125.476,93.091 126.809,91.757 ; R56.2 R55.2 126.734,91.682 126.809,91.757 ; U2.3 134.67,82.071 136.33,82.071 C16.2 136.526,83.819 131.699,88.646 129.921,88.646 126.809,91.757
VOTP: D2.2 U1.22 | length 5
  Top Layer w0.3: U1.22 122.745,80.462 v1(123.055,80.772) ; v1(123.444,82.677) D2.2
  Bottom Layer w0.3: v1(123.055,80.772) 123.055,82.251 123.444,82.641 v1(123.444,82.677)
pads on no net: IC1.7

## Polygon pours and split planes (outlines as drawn)
B- on Top Layer "B-_L01_P022" (solid, remove dead copper, pour order 22): 109.22,106.045 109.855,105.41 109.855,45.085 140.97,45.085 140.97,106.045
B- on Top Layer "B-_L01_P016" (solid, pour order 16): 108.458,66.076 110.363,66.076 110.363,67.092 108.458,67.092
B- on Top Layer "B-_L01_P015" (solid, pour order 15): 105.664,67.056 103.759,67.056 103.759,66.04 105.664,66.04
BS on Top Layer "BS_L01_P010" (solid, pour order 10): 32.106,68.888 39.954,68.888 39.954,66.345 40.259,66.04 44.069,66.04 44.069,68.872 44.053,68.888 51.901,68.888 51.901,66.209 52.07,66.04 55.753,66.04 56.003,66.29 56.003,68.888 63.851,68.888 63.881,68.858 63.881,66.167 64.135,65.913 67.437,65.913 67.945,66.421 67.94,66.426 67.94,68.888 75.789,68.888 75.819,68.858 75.819,66.294 76.2,65.913 79.248,65.913 79.878,66.543 79.878,68.888 87.727,68.888 87.757,68.858 87.757,66.167 88.011,65.913 91.44,65.913 91.816,66.289 91.816,68.888 99.665,68.888 99.992,69.215 101.6,69.215 101.6,68.326 102.997,66.929 102.997,64.389 101.408,62.8 28.64,62.8 26.67,64.77 26.67,74.93 29.845,74.93 29.845,70.485 28.575,69.215 28.575,66.04 28.956,65.659 31.623,65.659 32.106,66.142
P- on Top Layer "P-_L01_P012" (solid, pour order 12): 98.37,91.717 90.521,91.717 90.521,94.264 90.043,94.742 86.868,94.742 86.432,94.306 86.432,91.717 78.583,91.717 78.583,94.137 78.105,94.615 74.93,94.615 74.485,94.17 74.485,91.717 66.637,91.717 66.637,94.018 66.04,94.615 62.992,94.615 62.543,94.166 62.543,91.717 54.695,91.717 54.61,91.801 54.61,94.615 51.181,94.615 50.601,94.035 50.601,91.717 42.752,91.717 42.672,91.797 42.672,94.234 42.291,94.615 39.116,94.615 38.659,94.158 38.659,91.717 30.81,91.717 30.788,91.694 26.67,91.694 26.67,105.537 109.22,105.537 109.22,92.222 109.073,92.075 102.235,92.075 102.235,94.107 101.6,94.742 98.933,94.742 98.425,94.234
B- on Top Layer "B-_L01_P011" (solid, pour order 11): 33.732,59.2 110.236,59.2 110.236,45.085 26.67,45.085 26.67,59.2
BS on Top Layer "BS_L01_P009" (solid, pour order 9): 105.537,71.628 100.965,71.628 100.965,73.66 105.537,73.66
D on Top Layer "D_L01_P005" (solid, pour order 5): 30.353,89.154 30.353,71.247 66.548,71.247 66.675,71.374 100.33,71.374 100.33,89.154
RSP on Top Layer "RSP_L01_P008" (solid, pour order 8): 107.188,67.564 109.474,67.564 109.474,68.58 108.331,68.58 108.331,69.85 107.188,69.85
RSN1 on Top Layer "RSN1_L01_P007" (solid, pour order 7): 106.934,69.85 105.791,69.85 105.791,68.58 104.648,68.58 104.648,67.564 106.934,67.564
P- on Top Layer "P-_L01_P006" (solid, pour order 6): 100.965,89.789 100.965,88.011 106.172,88.011 106.172,89.789
P- on Top Layer "P-_L01_P004" (solid, pour order 4): 109.164,95.593 109.162,95.591 109.162,92.164 106.426,92.164 106.426,95.59
B- on Top Layer "B-_L01_P003" (solid, pour order 3): 125.684,87.445 125.684,83.751 123.952,83.751 123.952,87.445
B- on Top Layer "B-_L01_P002" (solid, pour order 2): 137.068,71.316 134.968,71.316 134.968,73.724 134.234,74.458 134.234,76.153 133.778,76.609 133.778,79.421 135.809,79.421 135.95,79.562 135.95,80.5 137.247,80.5 137.437,80.311 137.437,71.306
NetD1_2 on Top Layer "NETD1_2_L01_P001" (solid, pour order 1): 118.327,87.224 118.326,87.224 118.326,86.004 116.423,86.004 116.263,86.164 116.263,87.064 117.257,87.064 117.416,87.224
VCC on Top Layer "VCC_L01_P000" (solid, pour order 0): 125.984,87.681 125.984,79.002 127.234,79.002 127.305,79.073 127.305,81.356 127.457,81.356 128.143,82.042 128.143,87.678
B- on Bottom Layer "B-_L02_P024" (solid, remove dead copper, pour order 24): 109.22,106.045 109.855,105.41 109.855,45.085 140.97,45.085 140.97,106.045
B- on Bottom Layer "B-_L02_P021" (solid, pour order 21): 103.759,67.056 103.759,59.962 102.997,59.2 55.88,59.2 55.88,45.085 110.363,45.085 110.363,67.092
B- on Bottom Layer "B-_L02_P017" (solid, pour order 17): 102.997,59.2 98.57,59.2 98.552,59.182 98.552,45.72 102.997,45.72
B- on Bottom Layer "B-_L02_P018" (solid, pour order 18): 110.363,67.092 110.363,66.076 103.795,66.076 103.759,66.04 103.759,67.056
BS on Bottom Layer "BS_L02_P014" (solid, pour order 14): 103.251,73.66 100.965,73.66 100.965,68.778 100.071,67.885 100.071,66.172 100.33,65.913 102.108,65.913 103.251,67.056
P- on Bottom Layer "P-_L02_P013" (solid, pour order 13): 107.888,88.011 103.124,88.011 103.124,95.631 107.888,95.631
P- on Top Solder "P-_L01_P029" (solid, pour order 29): 109.093,105.537 109.093,96.266 26.67,96.266 26.67,105.537
B- on Top Solder "B-_L01_P027" (solid, pour order 27): 33.732,59.2 109.728,59.2 109.728,45.085 26.67,45.085 26.67,59.2

## Keep-outs
Keep-Out Layer:
  lines w0.254: 26.035,45.085 26.035,106.045 140.97,106.045 140.97,90.297 140.97,45.085 46.355,45.085 28.321,45.085 26.035,45.085

## Other copper
Top Layer:
  pour cut-out: 117.963,95.338 118.511,95.338 118.511,94.334 118.102,93.925 118.044,93.982 117.963,93.982
  pour cut-out: 122.174,88.011 122.047,87.884 114.935,87.884 114.935,93.091 115.062,93.218 122.174,93.218
  pour cut-out: 110.682,79.452 110.684,79.45 114.422,79.45 114.422,79.117 114.224,78.92 113.776,78.92 112.279,77.423 112.235,77.467 112.112,77.467 111.757,77.822 111.255,77.822 111.255,77.542 110.401,76.688 110.401,75.298 110.298,75.194 109.97,75.194 109.855,75.309 109.855,78.052 110.682,78.052 110.789,78.159 110.832,78.159 110.856,78.134 111.376,78.134 111.731,78.489 111.731,78.991 111.376,79.346 111.352,79.321 110.769,79.321 110.682,79.408
  pour cut-out: 114.71,75.504 111.826,75.504 111.914,75.592 111.914,75.904 113.303,77.293
  pour cut-out: 123.951,71.3 123.917,71.266 123.917,66.872 123.855,66.81 125.019,65.646 125.019,64.48 125.944,64.48 125.944,66.16 126.083,66.299 125.427,66.955 125.004,66.955 124.979,66.98 124.979,71.3
  pour cut-out: 115.315,71.3 115.29,71.275 115.29,66.96 114.941,66.96 114.884,66.903 114.884,66.821 116.48,65.225 116.48,64.48 117.308,64.48 117.447,64.619 117.447,66.299 116.791,66.955 116.368,66.955 116.368,71.275 116.343,71.3
  pour cut-out: 112.065,62.48 112.065,60.48 115.265,60.48 115.265,58.674 116.383,58.674 116.383,60.153 115.168,61.367 115.168,62.48
  pour cut-out: 127,58.674 124.968,56.642 124.968,53.34 114.935,53.34 114.681,53.594 114.681,56.134 114.046,56.769 114.046,58.674
  pour cut-out: 121.798,84.65 114.642,84.65 114.554,84.739 114.554,75.535 121.806,75.535 121.845,75.574